# EAGLE board tst (EAGLE 6.2)
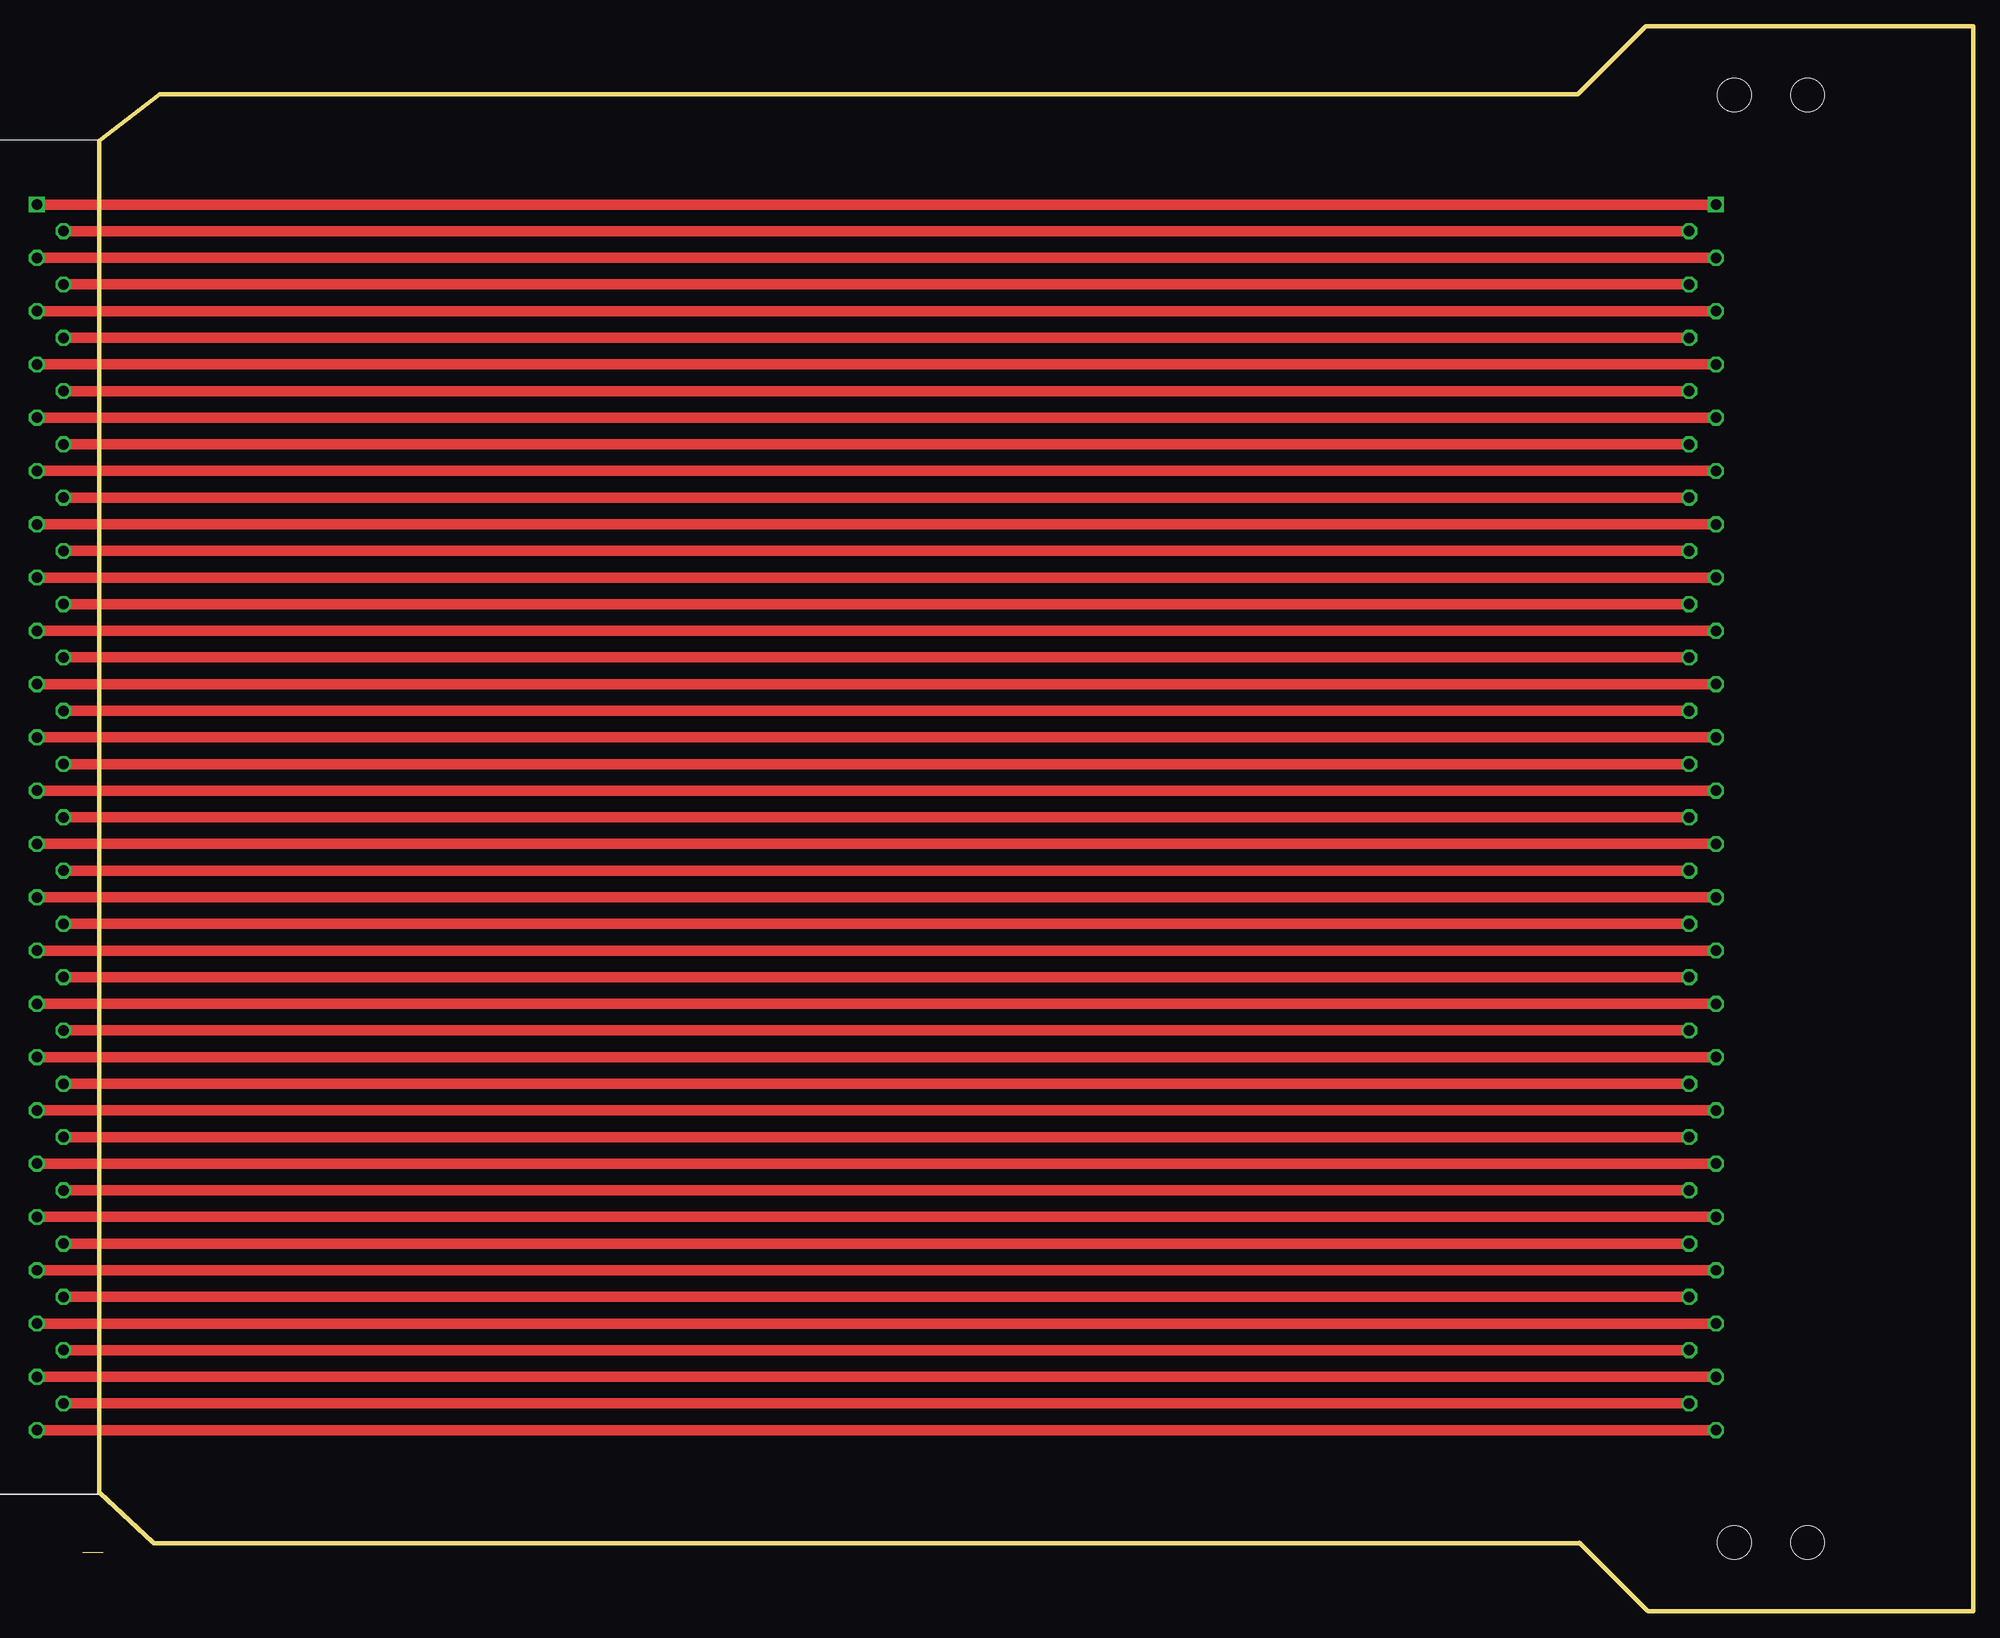
[diagram p0: board, top side]
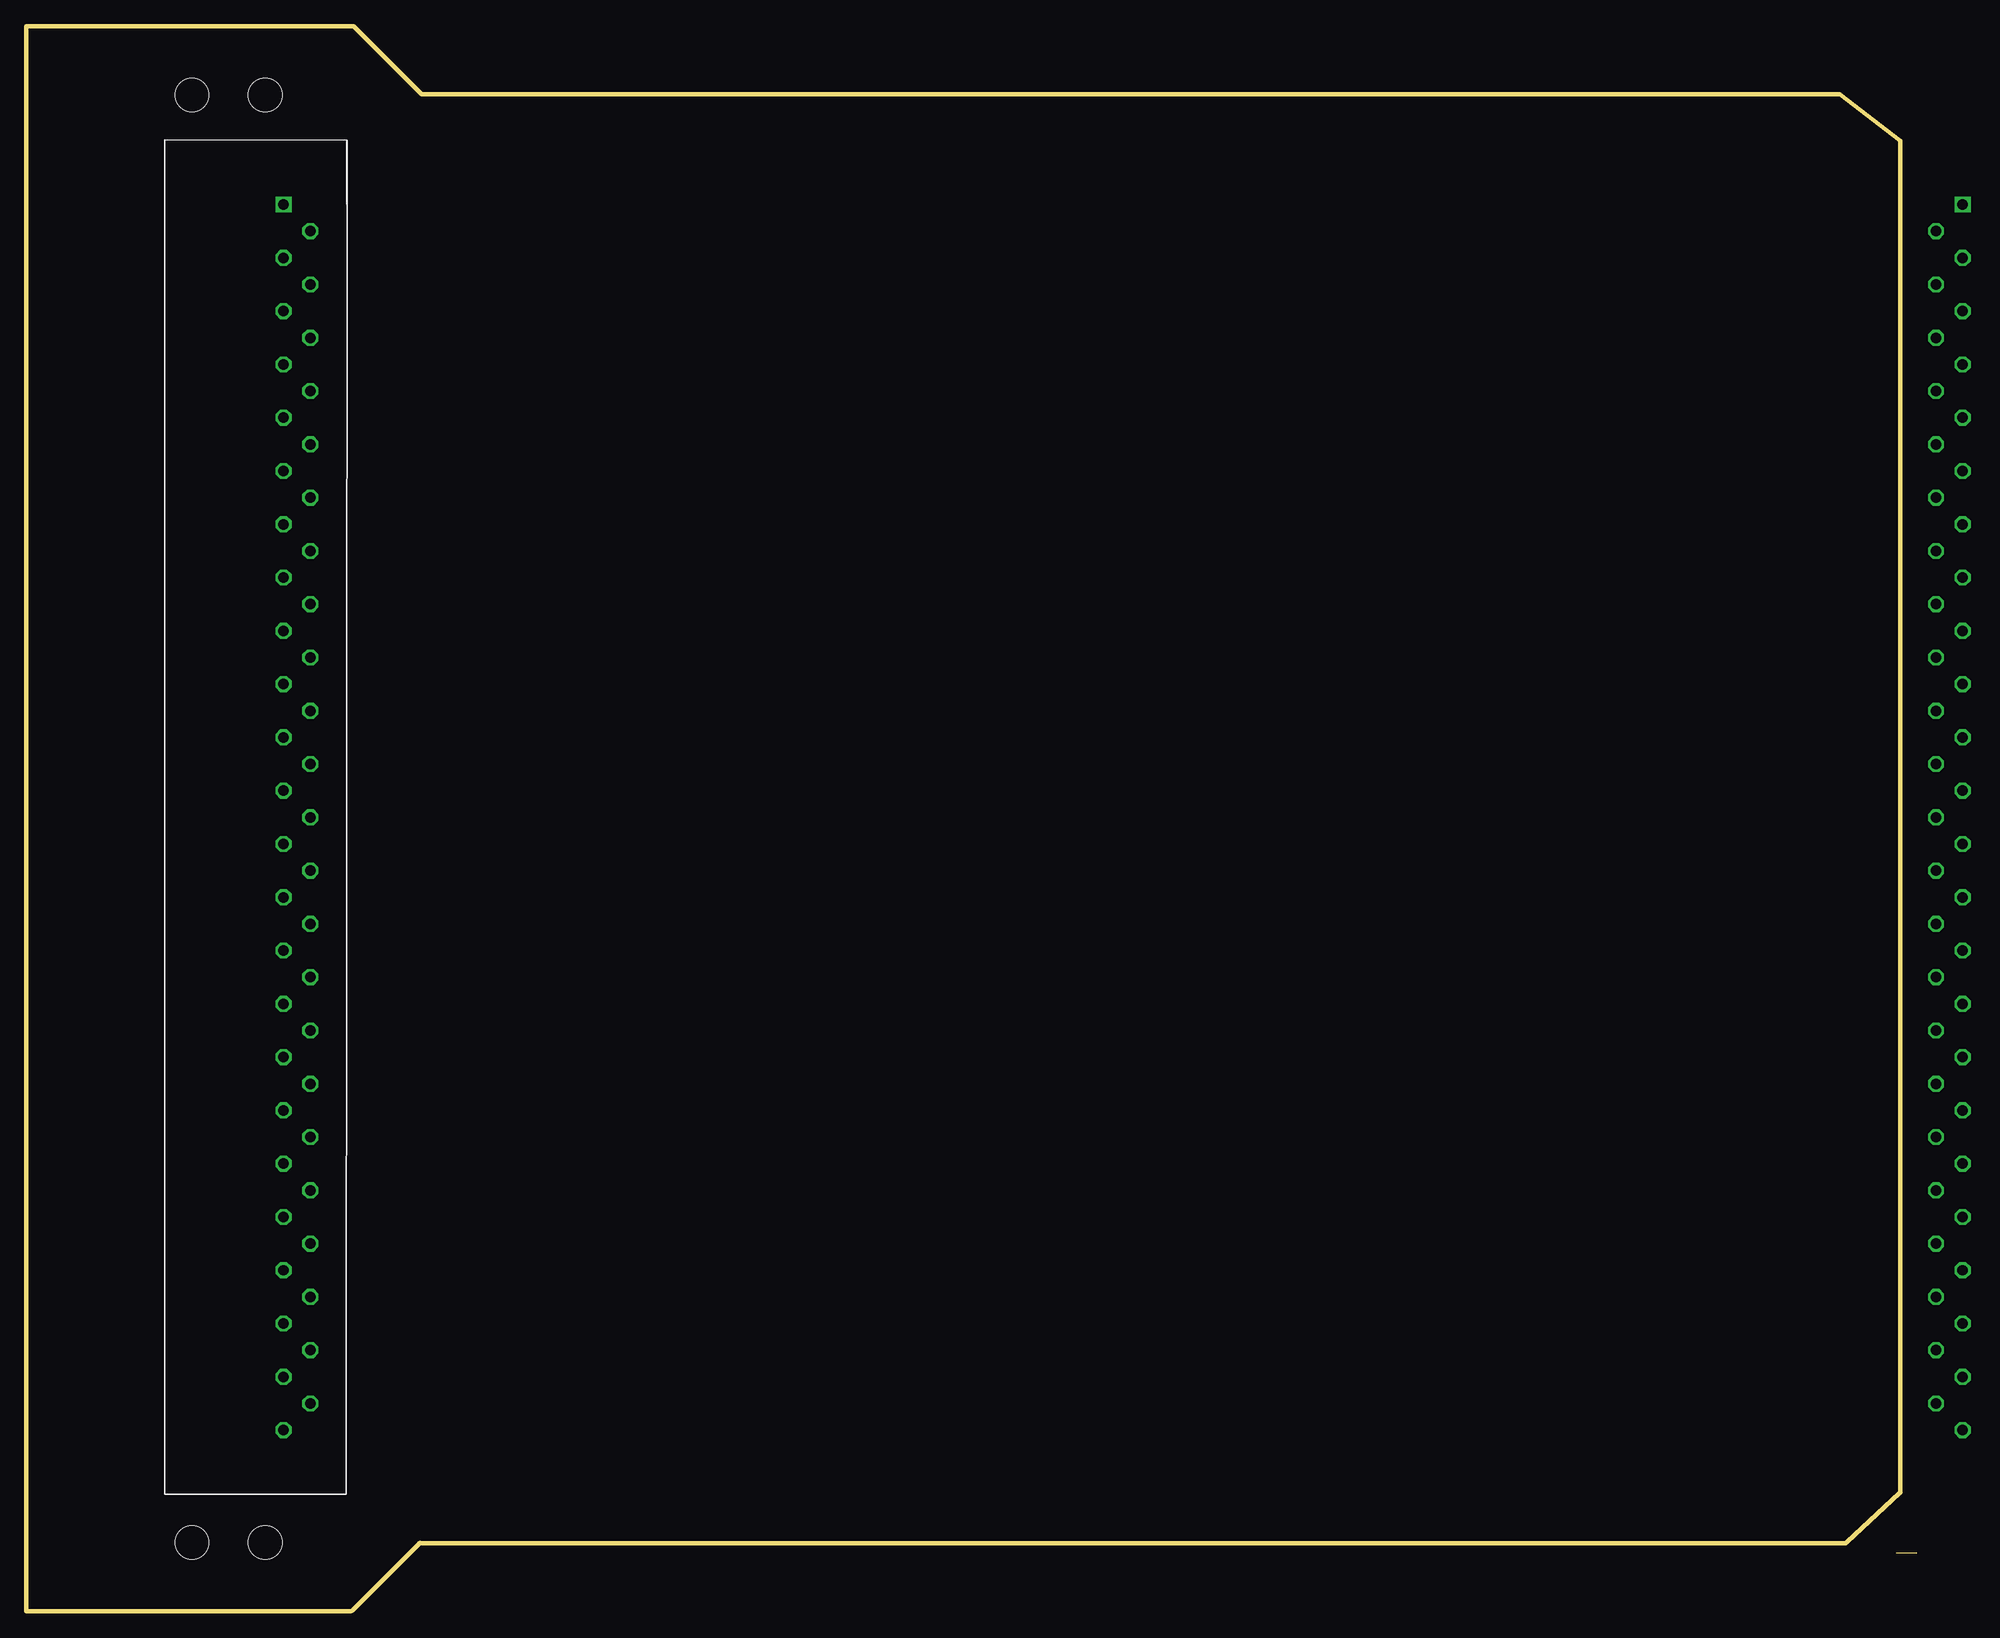
[diagram p1: board, bottom side, seen from below]

Size 180.31 x 151.13 mm. Coordinates in mm from the lower left corner, seen from the top.
Outline: 2,5.59 0,5.59
Outline: 7.35,144.62 1.62,140.22 1.62,11.32
Outline: 7.48,144.65 142.58,144.65
Outline: 6.78,6.51 142.85,6.51
Outline: 142.59,144.65 149.07,151.13 180.31,151.13 180.31,0 149.32,0
Outline: 149.24,0.08 142.76,6.56
Outline: 6.7,6.6 1.65,11.34
Copper layers (1*16): Top 0.035mm / dielectric 1.5mm / Bottom 0.035mm
Design rules: minimum track width 10mil, minimum drill 24mil, track to track 8mil, track to pad 8mil, pad to pad 8mil, via to via 8mil, smd to smd 8mil, copper to edge 40mil, drill to drill 8mil, minimum pad ring 10mil, minimum via ring 8mil, stop-mask expansion 4mil, vias tented up to drill 0mil, thermal gap 10mil
Holes 3.2 mm at 157.52,144.59 157.52,6.59 164.52,6.59 164.52,144.59

## Footprints (pad centres in the part's own frame; a part is rotated, then mirrored left to right if it is on the bottom)
47_PIN_CON = drill 1 square: P$1 2.54,50.8 | drill 1 octagon: P$2 5.08,48.26; P$3 2.54,45.72; P$4 5.08,43.18; P$5 2.54,40.64; P$6 5.08,38.1; P$7 2.54,35.56; P$8 5.08,33.02; P$9 2.54,30.48; P$10 5.08,27.94; P$11 2.54,25.4; P$12 5.08,22.86; P$13 2.54,20.32; P$14 5.08,17.78; P$15 2.54,15.24; P$16 5.08,12.7; P$17 2.54,10.16; P$18 5.08,7.62; P$19 2.54,5.08; P$20 5.08,2.54; P$21 2.54,0; P$22 5.08,-2.54; P$23 2.54,-5.08; P$24 5.08,-7.62; P$25 2.54,-10.16; P$26 5.08,-12.7; P$27 2.54,-15.24; P$28 5.08,-17.78; P$29 2.54,-20.32; P$30 5.08,-22.86; P$31 2.54,-25.4; P$32 5.08,-27.94; P$33 2.54,-30.48; P$34 5.08,-33.02; P$35 2.54,-35.56; P$36 5.08,-38.1; P$37 2.54,-40.64; P$38 5.08,-43.18; P$39 2.54,-45.72; P$40 5.08,-48.26; P$41 2.54,-50.8; P$42 5.08,-53.34; P$43 2.54,-55.88; P$44 5.08,-58.42; P$45 2.54,-60.96; P$46 5.08,-63.5; P$47 2.54,-66.04

## Placement (x,y rotation side)
U$1  47_PIN_CON  [47_PIN_CON]  158.31,83.33 0 bottom
U$2  47_PIN_CON  [47_PIN_CON]  -6.89,83.33 0 top

## Library data of the parts
U$1 U$2 = Dmitry

## Nets
N$1: U$1.P$1 U$2.P$1
N$2: U$1.P$2 U$2.P$2
N$3: U$1.P$3 U$2.P$3
N$4: U$1.P$4 U$2.P$4
N$5: U$1.P$5 U$2.P$5
N$6: U$1.P$6 U$2.P$6
N$7: U$1.P$7 U$2.P$7
N$8: U$1.P$8 U$2.P$8
N$9: U$1.P$9 U$2.P$9
N$10: U$1.P$10 U$2.P$10
N$11: U$1.P$11 U$2.P$11
N$12: U$1.P$12 U$2.P$12
N$13: U$1.P$13 U$2.P$13
N$14: U$1.P$14 U$2.P$14
N$15: U$1.P$15 U$2.P$15
N$16: U$1.P$16 U$2.P$16
N$17: U$1.P$17 U$2.P$17
N$18: U$1.P$18 U$2.P$18
N$19: U$1.P$19 U$2.P$19
N$20: U$1.P$20 U$2.P$20
N$21: U$1.P$21 U$2.P$21
N$22: U$1.P$22 U$2.P$22
N$23: U$1.P$23 U$2.P$23
N$24: U$1.P$24 U$2.P$24
N$25: U$1.P$25 U$2.P$25
N$26: U$1.P$26 U$2.P$26
N$27: U$1.P$27 U$2.P$27
N$28: U$1.P$28 U$2.P$28
N$29: U$1.P$29 U$2.P$29
N$30: U$1.P$30 U$2.P$30
N$31: U$1.P$31 U$2.P$31
N$32: U$1.P$32 U$2.P$32
N$33: U$1.P$33 U$2.P$33
N$34: U$1.P$34 U$2.P$34
N$35: U$1.P$35 U$2.P$35
N$36: U$1.P$36 U$2.P$36
N$37: U$1.P$37 U$2.P$37
N$38: U$1.P$38 U$2.P$38
N$39: U$1.P$39 U$2.P$39
N$40: U$1.P$40 U$2.P$40
N$41: U$1.P$41 U$2.P$41
N$42: U$1.P$42 U$2.P$42
N$43: U$1.P$43 U$2.P$43
N$44: U$1.P$44 U$2.P$44
N$45: U$1.P$45 U$2.P$45
N$46: U$1.P$46 U$2.P$46
N$47: U$1.P$47 U$2.P$47

## Tracks (layer width: path | path; a pad name or v marks a point on that pad's centre or on a via)
N$1
  Top 1.016: U$1.P$1 U$2.P$1
N$2
  Top 1.016: U$2.P$2 U$1.P$2
N$3
  Top 1.016: U$1.P$3 U$2.P$3
N$4
  Top 1.016: U$2.P$4 U$1.P$4
N$5
  Top 1.016: U$1.P$5 U$2.P$5
N$6
  Top 1.016: U$2.P$6 U$1.P$6
N$7
  Top 1.016: U$1.P$7 U$2.P$7
N$8
  Top 1.016: U$2.P$8 U$1.P$8
N$9
  Top 1.016: U$1.P$9 U$2.P$9
N$10
  Top 1.016: U$2.P$10 U$1.P$10
N$11
  Top 1.016: U$1.P$11 U$2.P$11
N$12
  Top 1.016: U$2.P$12 U$1.P$12
N$13
  Top 1.016: U$1.P$13 U$2.P$13
N$14
  Top 1.016: U$2.P$14 U$1.P$14
N$15
  Top 1.016: U$2.P$15 U$1.P$15
N$16
  Top 1.016: U$2.P$16 U$1.P$16
N$17
  Top 1.016: U$1.P$17 U$2.P$17
N$18
  Top 1.016: U$2.P$18 U$1.P$18
N$19
  Top 1.016: U$1.P$19 U$2.P$19
N$20
  Top 1.016: U$2.P$20 U$1.P$20
N$21
  Top 1.016: U$1.P$21 U$2.P$21
N$22
  Top 1.016: U$1.P$22 U$2.P$22
N$23
  Top 1.016: U$2.P$23 U$1.P$23
N$24
  Top 1.016: U$2.P$24 U$1.P$24
N$25
  Top 1.016: U$2.P$25 U$1.P$25
N$26
  Top 1.016: U$1.P$26 U$2.P$26
N$27
  Top 1.016: U$2.P$27 U$1.P$27
N$28
  Top 1.016: U$1.P$28 U$2.P$28
N$29
  Top 1.016: U$2.P$29 U$1.P$29
N$30
  Top 1.016: U$1.P$30 U$2.P$30
N$31
  Top 1.016: U$2.P$31 U$1.P$31
N$32
  Top 1.016: U$1.P$32 U$2.P$32
N$33
  Top 1.016: U$2.P$33 U$1.P$33
N$34
  Top 1.016: U$2.P$34 U$1.P$34
N$35
  Top 1.016: U$1.P$35 U$2.P$35
N$36
  Top 1.016: U$1.P$36 U$2.P$36
N$37
  Top 1.016: U$2.P$37 U$1.P$37
N$38
  Top 1.016: U$1.P$38 U$2.P$38
N$39
  Top 1.016: U$2.P$39 U$1.P$39
N$40
  Top 1.016: U$1.P$40 U$2.P$40
N$41
  Top 1.016: U$2.P$41 U$1.P$41
N$42
  Top 1.016: U$1.P$42 U$2.P$42
N$43
  Top 1.016: U$2.P$43 U$1.P$43
N$44
  Top 1.016: U$1.P$44 U$2.P$44
N$45
  Top 1.016: U$2.P$45 U$1.P$45
N$46
  Top 1.016: U$1.P$46 U$2.P$46
N$47
  Top 1.016: U$2.P$47 U$1.P$47